# Altium PCB ROUDN_PCB.pcbdoc
Units mil, origin at the board's own origin, x right, y up, seen from the top; angles counter-clockwise.
Board outline 3900 x 3540 mil, 2 copper layers (Top Layer, Bottom Layer); 45 components, 55 nets, 163 pads, 50 vias.
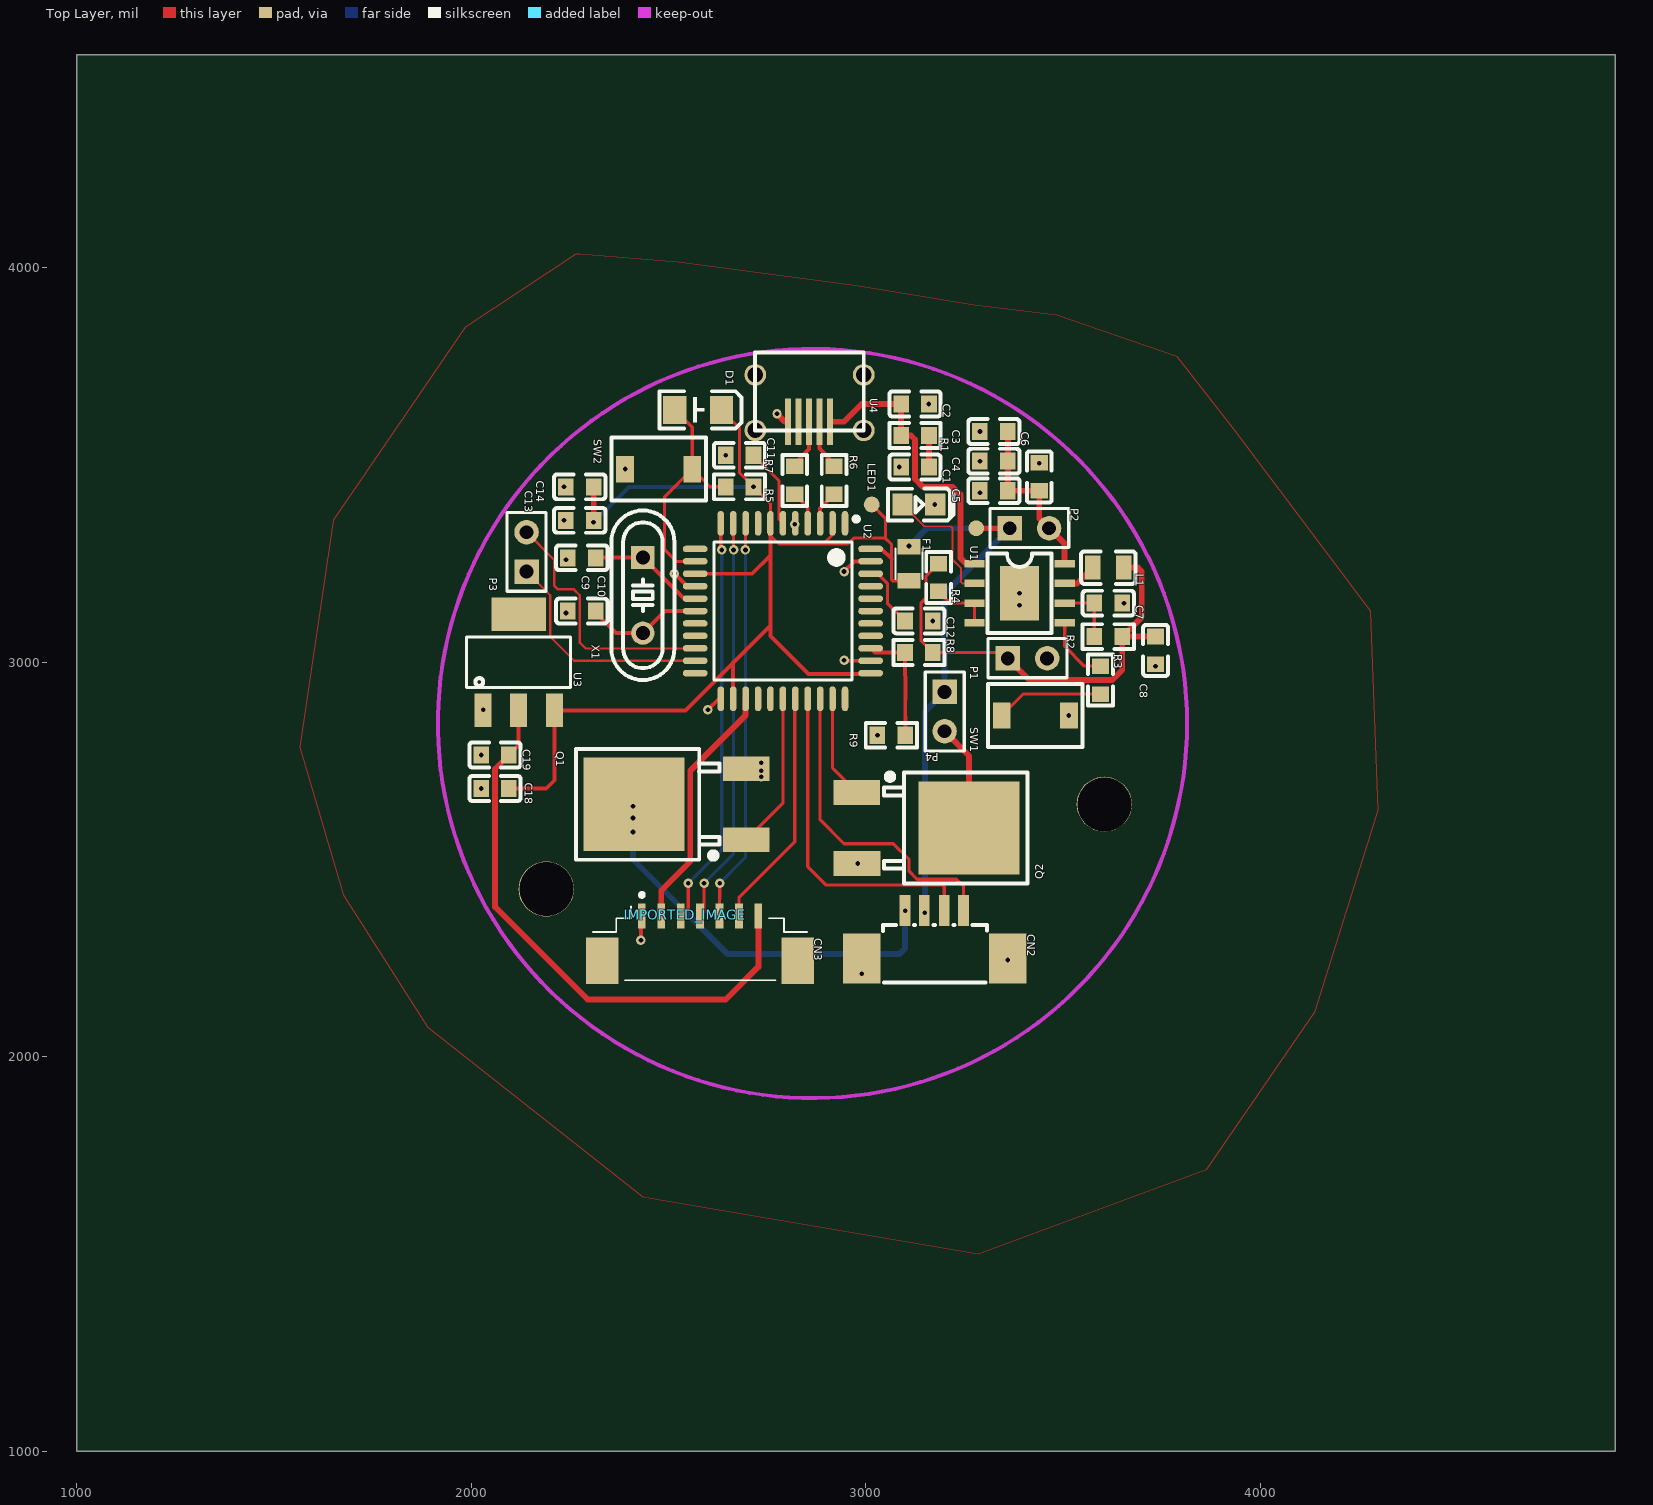
[diagram p0: Top Layer view]
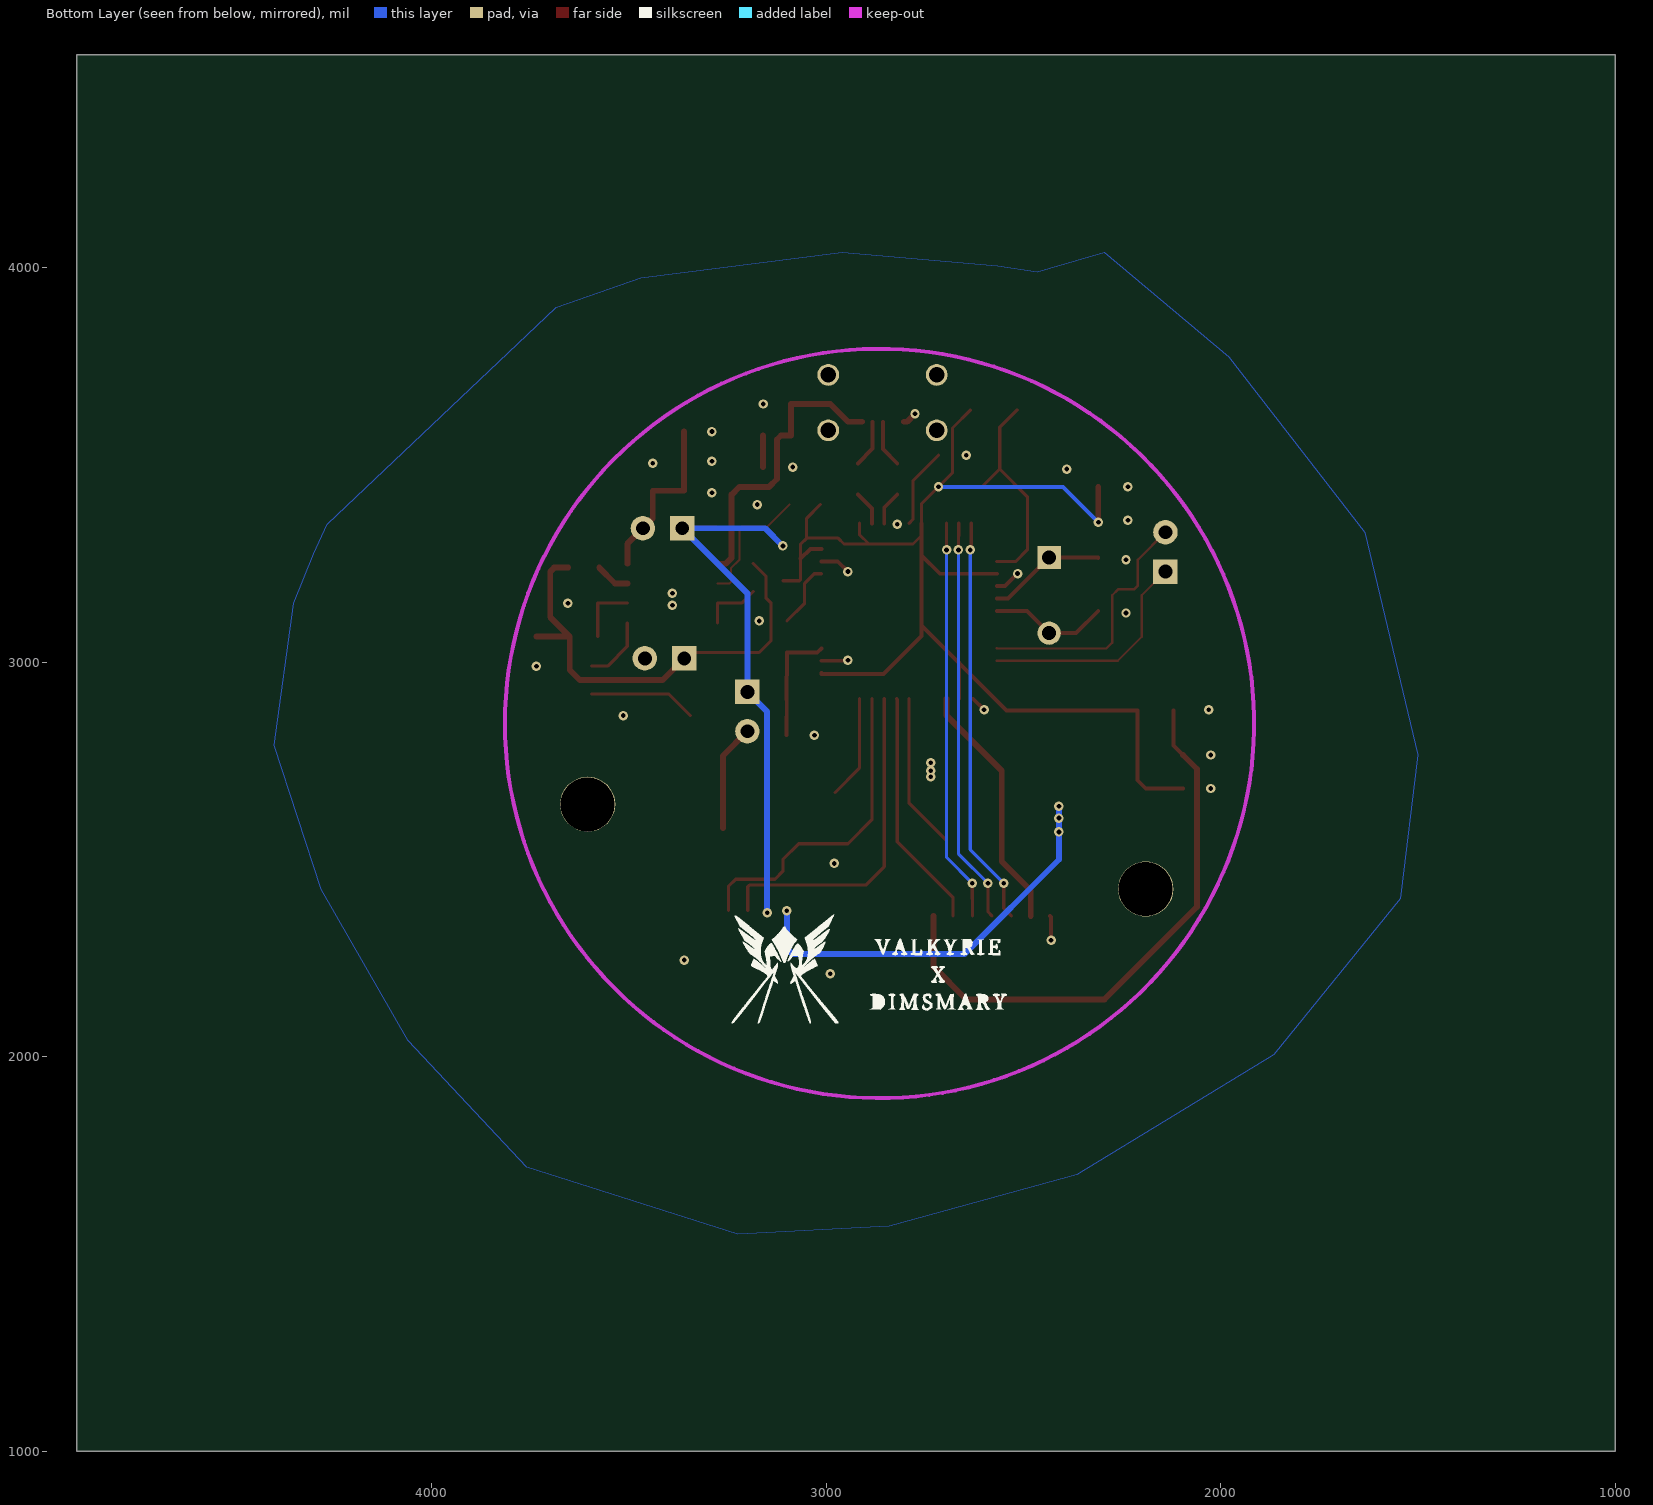
[diagram p1: Bottom Layer view, seen from below]

## Layer stack, top to bottom
Top Layer: signal copper (thickness not stored)
Dielectric: dielectric 12.6, FR-4, Dk 4.8
Bottom Layer: signal copper (thickness not stored)

## Board outline
4900,1000 1000,1000 1000,4540 4900,4540

## Components (designator, comment, footprint, x,y, rotation, side; value= is the part's Value field where it differs from the comment)
C1 "10u" C0603 3125,3495 r180 top
C2 "10u" C0603 3125,3655 r0 top
C3 "22u" C0603 3325,3585 r180 top
C4 "22u" C0603 3325,3510 r180 top
C5 "22u" C0603 3325,3435 r180 top
C6 "22u" C0603 3440,3470 r90 top
C7 "22u" C0603 3615,3150 r180 top
C8 "22u" C0603 3735,3030 r90 top
C9 "22p" C0603 2280,3265 r0 top
C10 "22p" C0603 2280,3130 r0 top
C11 "1u" C0603 2680,3525 r180 top
C12 "100n" C0603 3135,3105 r0 top
C13 "10u" C0603 2275,3360 r0 top
C14 "100n" C0603 2275,3445 r0 top
C18 "22U" C0603 2060,2680 r0 top
C19 "22U" C0603 2060,2765 r0 top
CN2 "1.25T-4P-WV" CONN-SMD_4P-1.25P_1.25T-4P 3175,2310 r180 top
CN3 "1.25T-7P" CON-SMD_7PIN_1.25T-7P 2580,2300 r180 top
D1 "1N4448" LED1206-R-RD 2575,3640 r180 top
F1 "Glass tube fuse2A 3F 250VAC" FUSE_SMD1206_REFLOW 3110,3250 r270 top
IMPORTED_IMAGE "IMPORTED_IMAGE" IMPORTED_IMAGE 2542.21,2360.03 r0 top
L1 "1u" C0805 3615,3240 r0 top
LED1 "LTST-C170TBKT" LED-0805 3135,3400 r180 top
P1 "BAT" HDR-1X2/2.54 3410,3010 r0 top
P2 "SW" HDR-1X2/2.54 3415,3340 r0 top
P3 "CAM_CTRL" HDR-1X2/2.54 2140,3280 r90 top
P4 "Cam" HDR-1X2/2.54 3200,2875 r270 top
Q1 "IRFR2407" TO-252-2_L6.6-W6.1-P4.57-LS9.9-BR-CW 2555,2640 r0 top
Q2 "IRFR2407" TO-252-2_L6.6-W6.1-P4.57-LS9.9-BR-CW 3120,2580 r180 top
R1 "2R" R0603 3125,3575 r0 top
R2 "0.5R" R0603 3615,3065 r0 top
R3 "10k" R0603 3595,2955 r90 top
R4 "1k" R0603 3185,3215 r270 top
R5 "10K" R0603 2680,3445 r0 top
R6 "22R" R0603 2919.97,3461.1 r270 top
R7 "22R" R0603 2819.97,3461.1 r270 top
R8 "1M" R0603 3135,3025 r180 top
R9 "100k" R0603 3065,2815 r180 top
SW1 "EVQ22705R" SMT_BUTTON 3430,2865 r90 top
SW2 "EVQ22705R" SMT_BUTTON 2475,3490 r90 top
U1 "IP5306" ESOP-8_L4.9-W3.9-P1.27-LS6.0-BL-EP 3390,3175 r270 top
U2 "ATMEGA32U4-AU" QFP-44_10X10X08P 2790,3130 r270 top
U3 "ASM1117" SOT223 2120,2995 r0 top
U4 "USB_PWR" MICROUSB 2995,3785 r270 top
X1 "16MHz" HC-49S 2435,3170 r270 top

## Footprints (in the part's own frame and the unit in brackets; to place one, negate y for a bottom-side part, rotate by r counter-clockwise, add the part's x,y. Pads: shape width x height; smd on the part's side, far side on the other; paste and mask are expansions set on the pad)
C0603 [mm]
  rect 1x1.1 smd: 1(-0.9,0) 2(0.9,0)
  silkscreen extent -1.65,-0.8 1.65,0.8
C0805 [mm]
  rect 1x1.55 smd: 1(-1,0) 2(1,0)
  silkscreen extent -1.75,-1.04 1.75,1.04
CON-SMD_7PIN_1.25T-7P [mm]
  rect 0.5x1.6 smd: 1(3.75,-1.45) 2(2.5,-1.45) 3(1.25,-1.45) 4(0,-1.45) 5(-1.25,-1.45) 6(-2.5,-1.45) 7(-3.75,-1.45)
  rect 2.1x3 smd: M1(6.3,1.45) M2(-6.3,1.45)
  silkscreen extent -6.9,-2.92 6.9,2.7
CONN-SMD_4P-1.25P_1.25T-4P [mm]
  rect 0.7x2 smd: 1(-1.863,-1.544) 2(-0.613,-1.544) 3(0.677,-1.529) 4(1.927,-1.546)
  rect 2.4x3.198 smd: 5(4.706,1.546)
  rect 2.4x3.2 smd: 6(-4.705,1.545)
  silkscreen extent -3.37,-0.61 3.34,3.09
ESOP-8_L4.9-W3.9-P1.27-LS6.0-BL-EP [mil]
  rect 18.9x51.18 smd: 1(-75,-114.5) 2(-25,-114.5) 3(25,-114.5) 4(75,-114.5) 5(75,114.5) 6(25,114.5) 7(-25,114.5) 8(-75,114.5)
  rect 137.8x98.42 smd: 9(0,0)
  silkscreen extent -100,-81 100,81
FUSE_SMD1206_REFLOW [mm]
  rect 1x1.5 smd: 1(-1.1,0) 2(1.1,0)
  silkscreen extent -1,-0.87 1,0.87
HC-49S [mm]
  rect 1.5x1.5 hole 0.9: 1(-2.438,0)
  round 1.5 hole 0.9: 2(2.438,0)
  silkscreen extent -5.46,-2.03 5.46,2.03
HDR-1X2/2.54 [mil]
  rect 62x62 hole 35: 1(-50,0)
  round 62 hole 35: 2(50,0)
  silkscreen extent -100,-49 100,50
IMPORTED_IMAGE [mil]
LED1206-R-RD [mm]
  rect 1.5x1.8 smd: 1(1.5,0) 2(-1.5,0)
  silkscreen extent -2.8,-1.2 2.5,1.2
LED-0805 [mil]
  rect 51.2x55.1 smd: 1(41.35,0) 2(-41.35,0)
  silkscreen extent -88,-41 78,40
MICROUSB [mm]
  rect 3x0.4 smd: 1(4.445,-2.178) 2(4.445,-2.853) 3(4.445,-3.528) 4(4.445,-4.203) 5(4.445,-4.878)
  round 1.4 hole 1: ""(1.428,0) ""(1.428,-6.985) ""(5,0) ""(5,-6.985)
  silkscreen extent 0,-7 5,0
QFP-44_10X10X08P [mm]
  oval 1.597x0.42 smd: 1(-5.65,4) 2(-5.65,3.2) 3(-5.65,2.4) 4(-5.65,1.6) 5(-5.65,0.8) 6(-5.65,0) 7(-5.65,-0.8) 8(-5.65,-1.6) 9(-5.65,-2.4) 10(-5.65,-3.2) 11(-5.65,-4) 23(5.65,-4) 24(5.65,-3.2) 25(5.65,-2.4) 26(5.65,-1.6) 27(5.65,-0.8) 28(5.65,0) 29(5.65,0.8) 30(5.65,1.6) 31(5.65,2.4) 32(5.65,3.2) 33(5.65,4)
  oval 0.42x1.597 smd: 12(-4,-5.65) 13(-3.2,-5.65) 14(-2.4,-5.65) 15(-1.6,-5.65) 16(-0.8,-5.65) 17(0,-5.65) 18(0.8,-5.65) 19(1.6,-5.65) 20(2.4,-5.65) 21(3.2,-5.65) 22(4,-5.65) 34(4,5.65) 35(3.2,5.65) 36(2.4,5.65) 37(1.6,5.65) 38(0.8,5.65) 39(0,5.65) 40(-0.8,5.65) 41(-1.6,5.65) 42(-2.4,5.65) 43(-3.2,5.65) 44(-4,5.65)
  silkscreen extent -6.08,-4.45 4.45,4.87
R0603 [mm]
  rect 1x1.1 smd: 1(-0.9,0) 2(0.9,0)
  silkscreen extent -1.65,-0.8 1.65,0.8
SMT_BUTTON [mil]
  rect 66.93x45.28 smd: 1(0,85) 2(0,-85)
  silkscreen extent -80,-120 80,120
SOT223 [mil]
  rect 43x85 smd: 1(-91,-117) 2(0,-117) 3(91,-117)
  rect 138x85 smd: 4(0,127)
  silkscreen extent -132,-59 132,69
TO-252-2_L6.6-W6.1-P4.57-LS9.9-BR-CW [mil]
  rect 118.1x63 smd: 1(142.4,-89.96)
  rect 255.9x236.2 smd: 2(-142.4,0)
  rect 118.2x63 smd: 3(142.15,89.96)
  silkscreen extent -290,-141 74,141

## Free pads (board coordinates)
  round 40 smd: 1(3015,3400) 1(3280,3340)
  round 140 hole 137: 3(2190,2425) 3(3605,2640)

## Via types
v1: diameter 24, hole 12, Top Layer to Bottom Layer, 50 vias

## Nets (pads, with @x,y where several pads share a name; then routed paths per layer and width w, separated by ;. In a path a pad name is that pad's centre, name@x,y a point inside that pad or via, vN(x,y) a via of type N, cw(c..) or ccw(c..) an arc to the next point about the centre after c; other vN are vias at no path point)
3.3V: C19.2 CN3.7 U3.2 | length 1451.5
  Top Layer w10: C19.2 2120,2789.56 U3.2
  Top Layer w15: C19.2 2060,2729.56 2060,2380 2295,2145 2645,2145 2727.64,2227.64 CN3.7
5V: C13.2 C14.2 C18.2 D1.2 F1.2 pad.1@3015,3400 R5.2 U2.2 U2.7 U2.14 U2.24 U2.34 U2.44 U3.3 | length 3410.5
  Top Layer w8: D1.2 2680,3594.06 2680,3480.44 v1(2715.44,3445) 2758.5,3401.94 U2.7 2758.5,3321.5 2780,3300 2955,3300 2970,3315 3050,3315 ; 2891.83,3300 2915.98,3324.15 U2.2 ; pad.1@3015,3400 3050,3365 3050,3315 ; F1.2 3068.31,3206.69 3065,3210 3065,3300 3050,3315
  Top Layer w10: C18.2 2190,2680 2211,2701 U3.3 2543,2878 2758.5,3093.5 ; U2.14 2711.66,3224.49 2758.5,3271.33 ; U2.24 2664.02,2999.02 2665.27,3000.27 ; U2.7 2758.5,3093.5 ; U2.34 3012.4,2970 2855,2970 2758.5,3066.5 2758.5,3093.5 ; U2.44 3040.44,3287.48 3065,3262.92
  Top Layer w15: C13.2 C14.2
  Bottom Layer w10: v1(2310,3355) 2400,3445 v1(2715.44,3445)
A0: R8.2 R9.1 U2.36 | length 309.5
  Top Layer w10: U2.36 3022.95,3025 R8.2 ; R8.2 3100.4,2905 ; 3100.3,2913 R9.1
BAT+: C8.2 L1.2 P1.1 R2.2 R4.1 R8.1 | length 1180.7
  Top Layer w8: R4.1 3153.28,3218.71 3153.28,3163.28 3140,3150 3140,3055.44 R8.1 3345,3025 P1.1
  Top Layer w15: P1.1 3415,2955 3625,2955 3650.4,2980.4 R2.2 C8.2 ; R2.2 3700,3114.57 3700,3230 3690,3240 L1.2
D4: CN3.2 U2.25 | length 639.1
  Top Layer w15: CN3.2 2481.57,2421.57 2555,2495 2555,2725 2695.51,2865.51 U2.25
D10: CN3.6 U2.29 | length 609.7
  Top Layer w8: CN3.6 2678.42,2403.42 2820,2545 2820,2906.06 U2.29
DATA_M: R6.2 U2.3 | length 87.9
  Top Layer w10: U2.3 2884.49,3390.12 R6.2@2920,3425.63
DATA_P: R7.2 U2.4 | length 86.9
  Top Layer w10: R7.2@2820,3425.63 2852.99,3392.64 U2.4
GND: C1.2 C2.2 C3.2 C4.2 C5.2 C6.2 C7.1 C8.1 C9.1 C10.1 C11.2 C12.2 C13.1 C14.1 C18.1 C19.1 CN2.5 CN2.6 CN3.1 LED1.2 P1.2 pad.3 Q1.3 Q2.3 R9.2 SW1.2 SW2.1 U1.9 U2.5 U2.15 U2.23 U2.35 U2.43 U3.1 U4.5 | length 354.7
  Top Layer w10: v1(2430,2295) 2430,2354.73 CN3.1 ; v1(2515,3225) 2547.01,3192.99 U2.15 ; v1(2600,2880) 2627.56,2907.56 U2.23 ; v1(2945,3005) U2.35 ; v1(2945,3230) 2970.98,3255.98 U2.43
  Top Layer w15: v1(2775,3630) 2795,3610 U4.5
  other v1: 2990,2210 3360,2245 2980,2490 2025,2680 2735,2710 2735,2725 2735,2745 2025,2765 3030,2815 3515,2865 2030,2880 3735,2990 3170,3105 2240,3125 3390,3145 3655,3150 3390,3175 2240,3260 2820,3350 2235,3360 3175,3400 3290,3430 2235,3445 2390,3490 3085,3495 3440,3505 3290,3510 2645,3525 3290,3585 3160,3655
ICO: C3.1 C4.1 C5.1 C6.1 P2.2 U1.8 | length 440.9
  Top Layer w15: C5.1 C6.1 ; C5.1 C3.1 ; C6.1 3440,3365 P2.2 3504.5,3300.5 U1.8
MISO: CN3.3 U2.11 | length 1039.5
  Top Layer w8: CN3.3 2550,2376.3 v1(2550,2440) ; U2.11 2632.52,3287.48 v1(2635,3285)
  Bottom Layer w8: v1(2550,2440) 2635,2525 v1(2635,3285)
MOSI: CN3.4 U2.10 | length 1030.5
  Top Layer w8: CN3.4 2590,2367.09 v1(2590,2440) ; U2.10 v1(2665,3285)
  Bottom Layer w8: v1(2590,2440) 2665,2515 v1(2665,3285)
Q2_2: P4.2 Q2.2 | length 270.8
  Top Layer w15: P4.2 3262.4,2762.6 Q2.2
R1_2: C1.1 R1.2 | length 80
  Top Layer w15: C1.1 R1.2
RST: D1.1 R5.1 SW2.2 U2.13 | length 595
  Top Layer w8: D1.1 2560,3595.95 SW2.2 ; U2.13 2519.02,3255.98 2490,3285 2490,3420 SW2.2 ; R5.1 2605,3445 SW2.2
S$18: 
S$20: 
S$1606: 
SCLK: CN3.5 U2.9 | length 1022.2
  Top Layer w8: CN3.5 v1(2630,2440) ; v1(2695,3285) U2.9
  Bottom Layer w8: v1(2630,2440) 2695,2505 v1(2695,3285)
SERVO1: CN2.1 U2.31 | length 819.3
  Top Layer w8: U2.31 2884.49,2600.51 2945,2540 3070,2540 3110,2500 3110,2470 3130,2450 3230,2450 3248.35,2431.65 CN2.1
SERVO2: CN2.2 U2.30 | length 853
  Top Layer w8: U2.30 2852.99,2482.01 2900,2435 3195,2435 3199.15,2430.85 CN2.2
SW1_1: R3.1 SW1.1 | length 272.6
  Top Layer w8: SW1.1 3399.57,2919.57 R3.1
SW1O: CN2.4 Q1.2 | length 1025.6
  Bottom Layer w15: v1(2410,2635) 2410,2500 2650,2260 3085,2260 3100,2275 v1(3100,2370)
  other v1: 2410,2570 2410,2605
SWITCH1: Q2.1 U2.32 | length 263.1
  Top Layer w8: U2.32 2915.98,2731.58 Q2.1
SWITCH2: Q1.1 U2.28 | length 395.9
  Top Layer w8: Q1.1 2790,2642.64 U2.28
U1_2: LED1.1 U1.2 | length 332.1
  Top Layer w5: LED1.1 3148.65,3345 3215,3345 3220,3340 3220,3260 3241.65,3238.35 3241.65,3203.35 3245,3200 U1.2
U1_3: R4.2 U1.3 U1.4 | length 152.7
  Top Layer w8: R4.2 3214.56,3150 U1.3 U1.4
U1_5: R3.2 U1.5 | length 170.7
  Top Layer w8: U1.5 3504.5,3040.5 3554.56,2990.44 R3.2
U1_6: C7.2 R2.1 U1.6 | length 160.1
  Top Layer w8: U1.6 C7.2 R2.1
U1_7: L1.1 U1.7 | length 87.7
  Top Layer w15: U1.7 3535.63,3200 L1.1
U2_1: U2.1
U2_6: C11.1 U2.6 | length 203.4
  Top Layer w8: C11.1 2780,3460.43 2780,3362.44 U2.6
U2_8: U2.8
U2_12: U2.12
U2_16: C9.2 U2.16 X1.1 | length 300.8
  Top Layer w10: C9.2@2310.44,3265 2311.44,3266 X1.1 2539.5,3161.5 U2.16
U2_17: C10.2 U2.17 X1.2 | length 303.5
  Top Layer w10: C10.2@2310.44,3130 2366.44,3074 X1.2 2491,3130 U2.17
U2_18: U2.18
U2_19: U2.19
U2_20: P3.2 U2.20 | length 658.2
  Top Layer w6: P3.2 2210,3260 2210,3195 2220,3185 2260,3185 2275,3170 2275,3050 2290,3035 U2.20
U2_21: P3.1 U2.21 | length 582.7
  Top Layer w6: P3.1 2200,3170 2200,3065 2260.98,3004.02 U2.21
U2_22: U2.22
U2_26: U2.26
U2_27: U2.27
U2_33: U2.33
U2_37: U2.37
U2_38: U2.38
U2_39: U2.39
U2_40: U2.40
U2_41: U2.41
U2_42: C12.1 U2.42 | length 166.2
  Top Layer w8: U2.42 3030.51,3224.49 3055,3200 3055,3149.57 C12.1
U4_2: R6.1 U4.2 | length 121.1
  Top Layer w10: U4.2 2882.68,3541.69 R6.1@2920,3504.37
U4_3: R7.1 U4.3 | length 120.6
  Top Layer w10: R7.1@2820,3504.37 2856.1,3540.47 U4.3
U4_4: U4.4
VIN: C2.1 R1.1 U1.1 U4.1 | length 751.8
  Top Layer w15: U4.1@2909.25,3610 2945,3610 2990,3655 C2.1 R1.1 3115,3575 3125,3565 3125,3465 3145,3445 3220,3445 3240,3425 3240,3265 3255,3250 U1.1
VOUT: CN2.3 F1.1 P2.1 P4.1 pad.1@3280,3340 | length 1412.7
  Top Layer w15: pad.1@3280,3340 P2.1
  Bottom Layer w15: v1(3110,3295) 3155,3340 P2.1 3200,3175 P4.1 3150,2875 v1@3150,2375
  other v1: 3150,2365
pads on no net: CN3.M1 CN3.M2 U3.4 U4.

## Polygon pours and split planes (outlines as drawn)
GND on Bottom Layer (solid): 1980,3775 1635,3330 1500,2765 1545,2400 1865,2005 2365,1700 2840,1570 3225,1550 3760,1720 4060,2040 4280,2425 4400,2790 4350,3150 4300,3275 4265,3350 3685,3900 3470,3975 2960,4040 2565,4005 2465,3990 2295,4040
GND on Top Layer (solid): 1985,3850 1650,3360 1565,2785 1675,2410 1890,2075 2435,1645 3285,1500 3865,1715 4140,2115 4300,2625 4280,3130 3935,3590 3790,3775 3485,3880 3275,3905 2975,3955 2525,4015 2275,4035 2265,4035

## Keep-outs
Keep-Out Layer:
  circle w10 net S$1606: c2865,2845 r950